# Altium PCB 球锁设置板改版20425.PCBDOC
Units mil, origin at the board's own origin, x right, y up, seen from the top; angles counter-clockwise.
Board outline 1259.72 x 285.24 mil, 2 copper layers (Top, Bottom), stack 12.7 mil thick; 5 components, 4 nets, 11 pads, 4 vias.
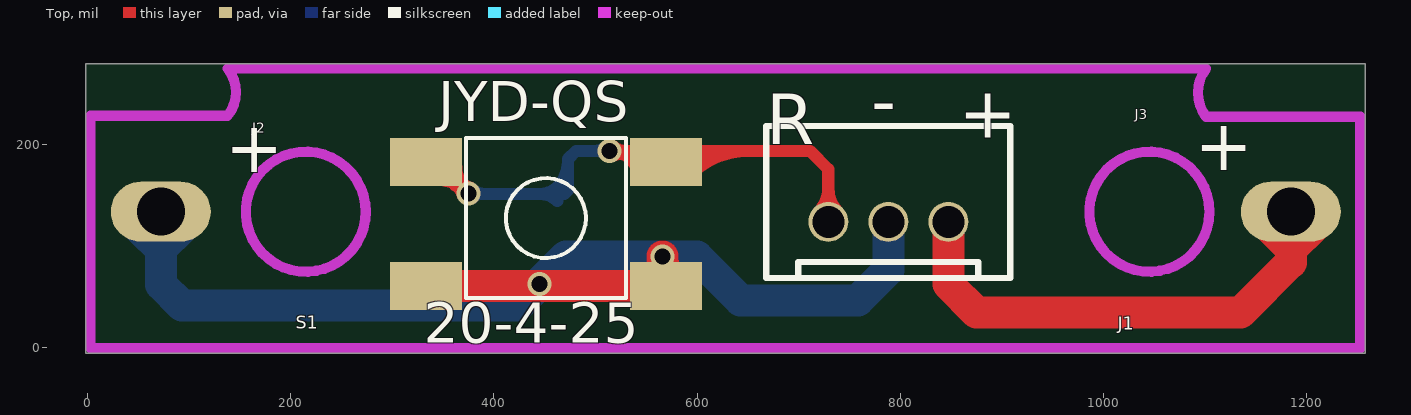
[diagram p0: Top view]
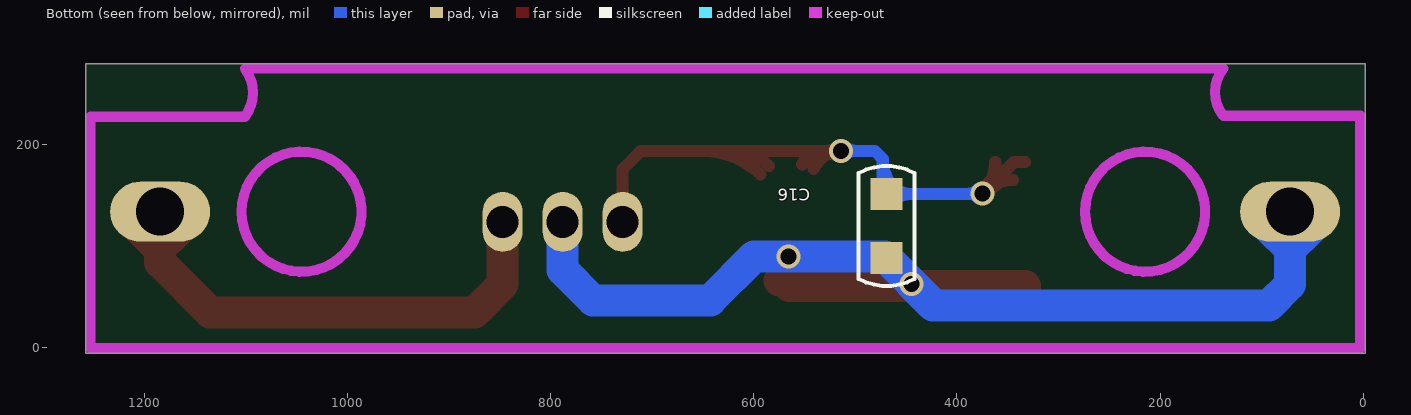
[diagram p1: Bottom view, seen from below]

## Layer stack, top to bottom
Top: signal copper 1.35
Dielectric: core 10, FR-4, Dk 4.3
Bottom: signal copper 1.35

## Board outline
-1.97,-5.28 1257.76,-5.28 1257.76,279.96 -1.97,279.96

## Design rules (kind name [scope] priority, off if disabled: settings)
Clearance [All] p1: gap=7.87
ComponentClearance [All] p1: gap=0 collisioncheckmode=3 verticalgap=0 showdistances=FALSE
FabricationTestPointUsage TestPointUsage [All] p1: valid=0 allowmultiple=FALSE
FabricationTestpoint Testpoint [All] p1: side=3 testpointundercomponent=TRUE minsize=40 maxsize=100 preferedsize=60 minholesize=0 maxholesize=40 preferedholesize=32 testpointgrid=1 allowsidetop=TRUE allowsidebottom=TRUE usegrid=TRUE gridtolerance=0.01
HoleSize [All] p1: absolutevalues=TRUE maxlimit=100 minlimit=10 maxpercent=80.000 minpercent=20.000
MinimumSolderMaskSliver [All] p1: minsoldermaskwidth=0
PlaneConnect "Power Plane Connect Style - from global settings" [All] p1: planeconnectstyle=Relief reliefexpansion=20 reliefentries=4 reliefconductorwidth=10 reliefairgap=10
PolygonConnect [All] p1: connectstyle=Relief reliefconductorwidth=12.01 reliefentries=4 polygonreliefangle="90 Angle" airgapwidth=10
RoutingVias [All] p1: holewidth=15.75 width=23.62 viastyle="Through Hole" minholewidth=15.75 minwidth=23.62 maxholewidth=15.75 maxwidth=23.62
SilkToSilkClearance [All] p1: silktosilkclearance=0
SilkToSolderMaskClearance SilkscreenOverComponentPads [IsPad] p1: minsilkscreentomaskgap=0 clearancetoexposedcopper=TRUE
SolderMaskExpansion [All] p1: expansion=4
Width [All] p1: maxlimit=39.37 minlimit=3.94 preferedwidth=10
20 further rules are at their usual default settings.

## Components (designator, comment, footprint, x,y, rotation, side; value= is the part's Value field where it differs from the comment)
C16 "C0603" C0603 469.29,120.08 r270 bottom
J1 "3PIN-1.5J" 3P-1.5_ZH-A 788.15,124.17 r180 top
J2 "2P_2.54" 2P_2.54#1 72.09,162.64 r270 top
J3 "2P_2.54" 2P_2.54#2 1184.29,60.59 r90 top
S1 "SW3" SW3 451.1,127.83 r180 top

## Footprints (in the part's own frame and the unit in brackets; to place one, negate y for a bottom-side part, rotate by r counter-clockwise, add the part's x,y. Pads: shape width x height; smd on the part's side, far side on the other; paste and mask are expansions set on the pad)
2P_2.54#1 [mm]
  oval 1.5x2.5 hole 1.2: 2(0.725,0)
2P_2.54#2 [mm]
  oval 1.5x2.5 hole 1.2: 2(1.867,0)
3P-1.5_ZH-A [mm]
  round 1 / inner round 1 / far side oval 1x1.5 hole 0.8: 1(-1.5,0) 2(0,0) 3(1.5,0)
  silkscreen extent -3.05,-2.4 3.05,1.4
C0603 [mm]
  rect 0.8x0.8 smd: 1(-0.8,0) 2(0.8,0)
  silkscreen extent -1.5,-0.7 1.5,0.7
SW3 [mm]
  rect 1.8x1.2 smd: 1(-3,-1.403) 2(-3,1.697) 3(3,-1.403) 4(3,1.697)
  silkscreen extent -2,-2 2,2

## Via types
v1: diameter 23.62, hole 15.75, Top to Bottom, 4 vias

## Nets (pads, with @x,y where several pads share a name; then routed paths per layer and width w, separated by ;. In a path a pad name is that pad's centre, name@x,y a point inside that pad or via, vN(x,y) a via of type N, cw(c..) or ccw(c..) an arc to the next point about the centre after c; other vN are vias at no path point)
$$$7: J1.1 J3.2 | length 532.5
  Top w31.5: J1.1 847.2,62.8 875,35 915,35 1135,35 1184.29,84.29 J3.2 ; J3.2@1174.55,124.35 cw(c1151.02,100.83) 1184.29,100.83 cw(c1217.56,100.83) J3.2@1194.03,124.35
$$$8: 
GND: C16.2 J1.2 J2.2 S1.2 S1.4 | length 1262
  Top w31.5: S1.4 564.76,61.02 566,62.27 v1(566,90) ; v1@566,87.79 ccw(c595.98,87.79) S1.2@574.78,66.59
  Bottom w31.5: J2.2@62.34,124.35 cw(c38.82,100.83) 72.09,100.83 cw(c105.35,100.83) J2.2@81.83,124.35 ; J2.2 72.09,62.64 92.87,41.85 422.56,41.85 ; v1(445,63) 423.85,41.85 422.56,41.85 ; J1.2 788.15,76.61 758.46,46.93 642.76,46.93 599.68,90 v1(566,90) 470.71,90 C16.2 422.56,41.85
SWDIO/INIT_KEY: C16.1 J1.3 S1.1 S1.3 | length 1004.1
  Top w12: S1.3 343.93,183.07 v1(375,152) cw(c405.36,182.37) S1.3@362.42,182.87 ; S1.3@344.8,165.45 cw(c344.8,125.02) v1@373.39,153.61 ; S1.3@361.92,160.23 cw(c353.9,146.35) v1@369.39,150.5 ; 364.37,158.81 ccw(c370.38,169.23) v1@373.5,157.61 ; v1@369.19,152 ccw(c355.16,152) 365.08,161.92 ccw(c375,171.84) v1@375,157.81 ; v1@369.39,153.5 ccw(c355.84,157.13) 367.99,164.15 ccw(c380.14,171.17) v1@376.5,157.61 ; v1@516.91,188.97 cw(c523.92,176.82) 527.55,190.37 cw(c531.18,203.92) v1@519.03,196.91 ; v1@518.11,189.89 cw(c528.03,179.97) 528.03,194 cw(c528.03,208.03) v1@518.11,198.11 ; 532.24,194 cw(c532.24,172.22) S1.1@552.24,180.85 ; S1.1@541.22,176.09 ccw(c514,164.36) v1(514,194) 699,194 711,194 729.09,175.91 J1.3 ; S1.1@585,179.1 cw(c620.98,143.11) 620.98,194 ; S1.1@593.48,170.61 cw(c649.95,114.14) 649.95,194 ; J1.3@719.42,133.85 ccw(c696.06,157.21) 729.09,157.21 ccw(c762.13,157.21) J1.3@738.77,133.85
  Bottom w12: v1(375,152) 375.43,151.57 C16.1 473,155.28 473,186 481,194 v1(514,194) ; v1@379.11,147.89 cw(c388,139) 388,151.57 ; v1@379.11,156.11 ccw(c390.06,167.06) 390.06,151.57 ; C16.1@462.4,144.68 ccw(c445.76,128.04) 445.76,151.57 ccw(c445.76,175.11) 462.4,158.47 ccw(c436.8,184.06) 473,184.06 ; C16.1@470.06,152.8 C16.1@470.16,152.73 ; v1@509.89,189.89 ccw(c499.97,179.97) 499.97,194 ccw(c499.97,208.03) v1@509.89,198.11

## Keep-outs
Keep-Out Layer:
  circle w10: c214.84,134.09 r59.06
  circle w10: c1045.15,134.09 r59.06
  lines w10: 1100.82,227.61 cw(c1132.34,251.28) 1100.82,274.95 ; 1100.83,227.6 1252.76,227.6 1252.76,-0.28 3.03,-0.28 3.03,228.5 137.8,228.5 ccw(c109.51,251.73) 137.79,274.96 1100.83,274.96

## Other copper
Top:
  region net $$$7: 1185,75 1230,120 1190,160 1145,115
Bottom:
  region net GND: 72.09,75 116.04,118.96 75,160 31.04,116.04

## Silkscreen, mask and mechanical layers (free items; w line width, h text height)
Silkscreen Top:
  text "JYD-QS" at 345,223 h39.37
  text "-" at 771.26,218.7 h50
  text "+" at 857.44,207.01 h50
  text "R" at 668.11,200.63 h50
  text "+" at 1090,175 h50
  text "+" at 135.51,172.8 h50
  text "20-4-25" at 331,5 h39.37
Drill Drawing:
  lines w1: 0,114.11 0.03,114.11 ; 619.31,274.96 619.34,274.96 ; 630.06,-0.28 630.09,-0.28 ; 1252.76,113.66 1252.78,113.66 ; 3.03,114.11 3.06,114.11